# EAGLE board g3528-plcc2-led-breakout (EAGLE 6.2)
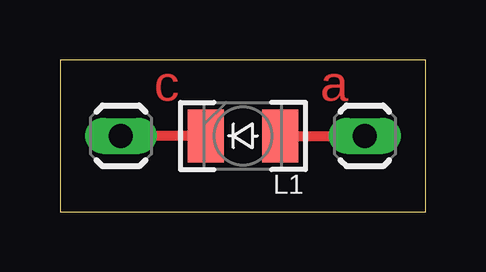
[diagram p0: board, top side]

Size 15.24 x 6.35 mm. Coordinates in mm from the lower left corner, seen from the top.
Outline: 0,0 15.24,0 15.24,6.35 0,6.35 0,0
Copper layers (1*16): Top 0.035mm / dielectric 1.5mm / Bottom 0.035mm
Design rules: minimum track width 10mil, minimum drill 24mil, track to track 8mil, track to pad 8mil, pad to pad 8mil, via to via 8mil, smd to smd 8mil, copper to edge 40mil, drill to drill 8mil, minimum pad ring 10mil, minimum via ring 8mil, stop-mask expansion 4mil, vias tented up to drill 0mil, thermal gap 10mil

## Footprints (pad centres in the part's own frame; a part is rotated, then mirrored left to right if it is on the bottom)
BREAKAWAY_STRAIGHT_1_WIDE = drill 1 long: 1 0,0
G3528 = smd 1.5 x 2.2: A -1.55,0; C 1.55,0

## Placement (x,y rotation side)
C1  [BREAKAWAY_STRAIGHT_1_WIDE]  12.7,3.17 0 top
C2  [BREAKAWAY_STRAIGHT_1_WIDE]  2.54,3.17 0 top
L1  [G3528]  7.62,3.17 180 top

## Library data of the parts
C1 C2 = icmi-connectors
L1 = icmi-leds

## Nets
N$1: C1.1 L1.A
N$2: C2.1 L1.C

## Tracks (layer width: path | path; a pad name or v marks a point on that pad's centre or on a via)
N$1
  Top 0.406: L1.A C1.1
N$2
  Top 0.406: L1.C C2.1

## Text on the board
Top: c | a